# Altium PCB PCB1.PcbDoc
Units mm, origin at the board's own origin, x right, y up, seen from the top; angles counter-clockwise.
Board outline 60 x 60 mm, 2 copper layers (Top Layer, Bottom Layer); 35 components, 16 nets, 138 pads, 39 vias.
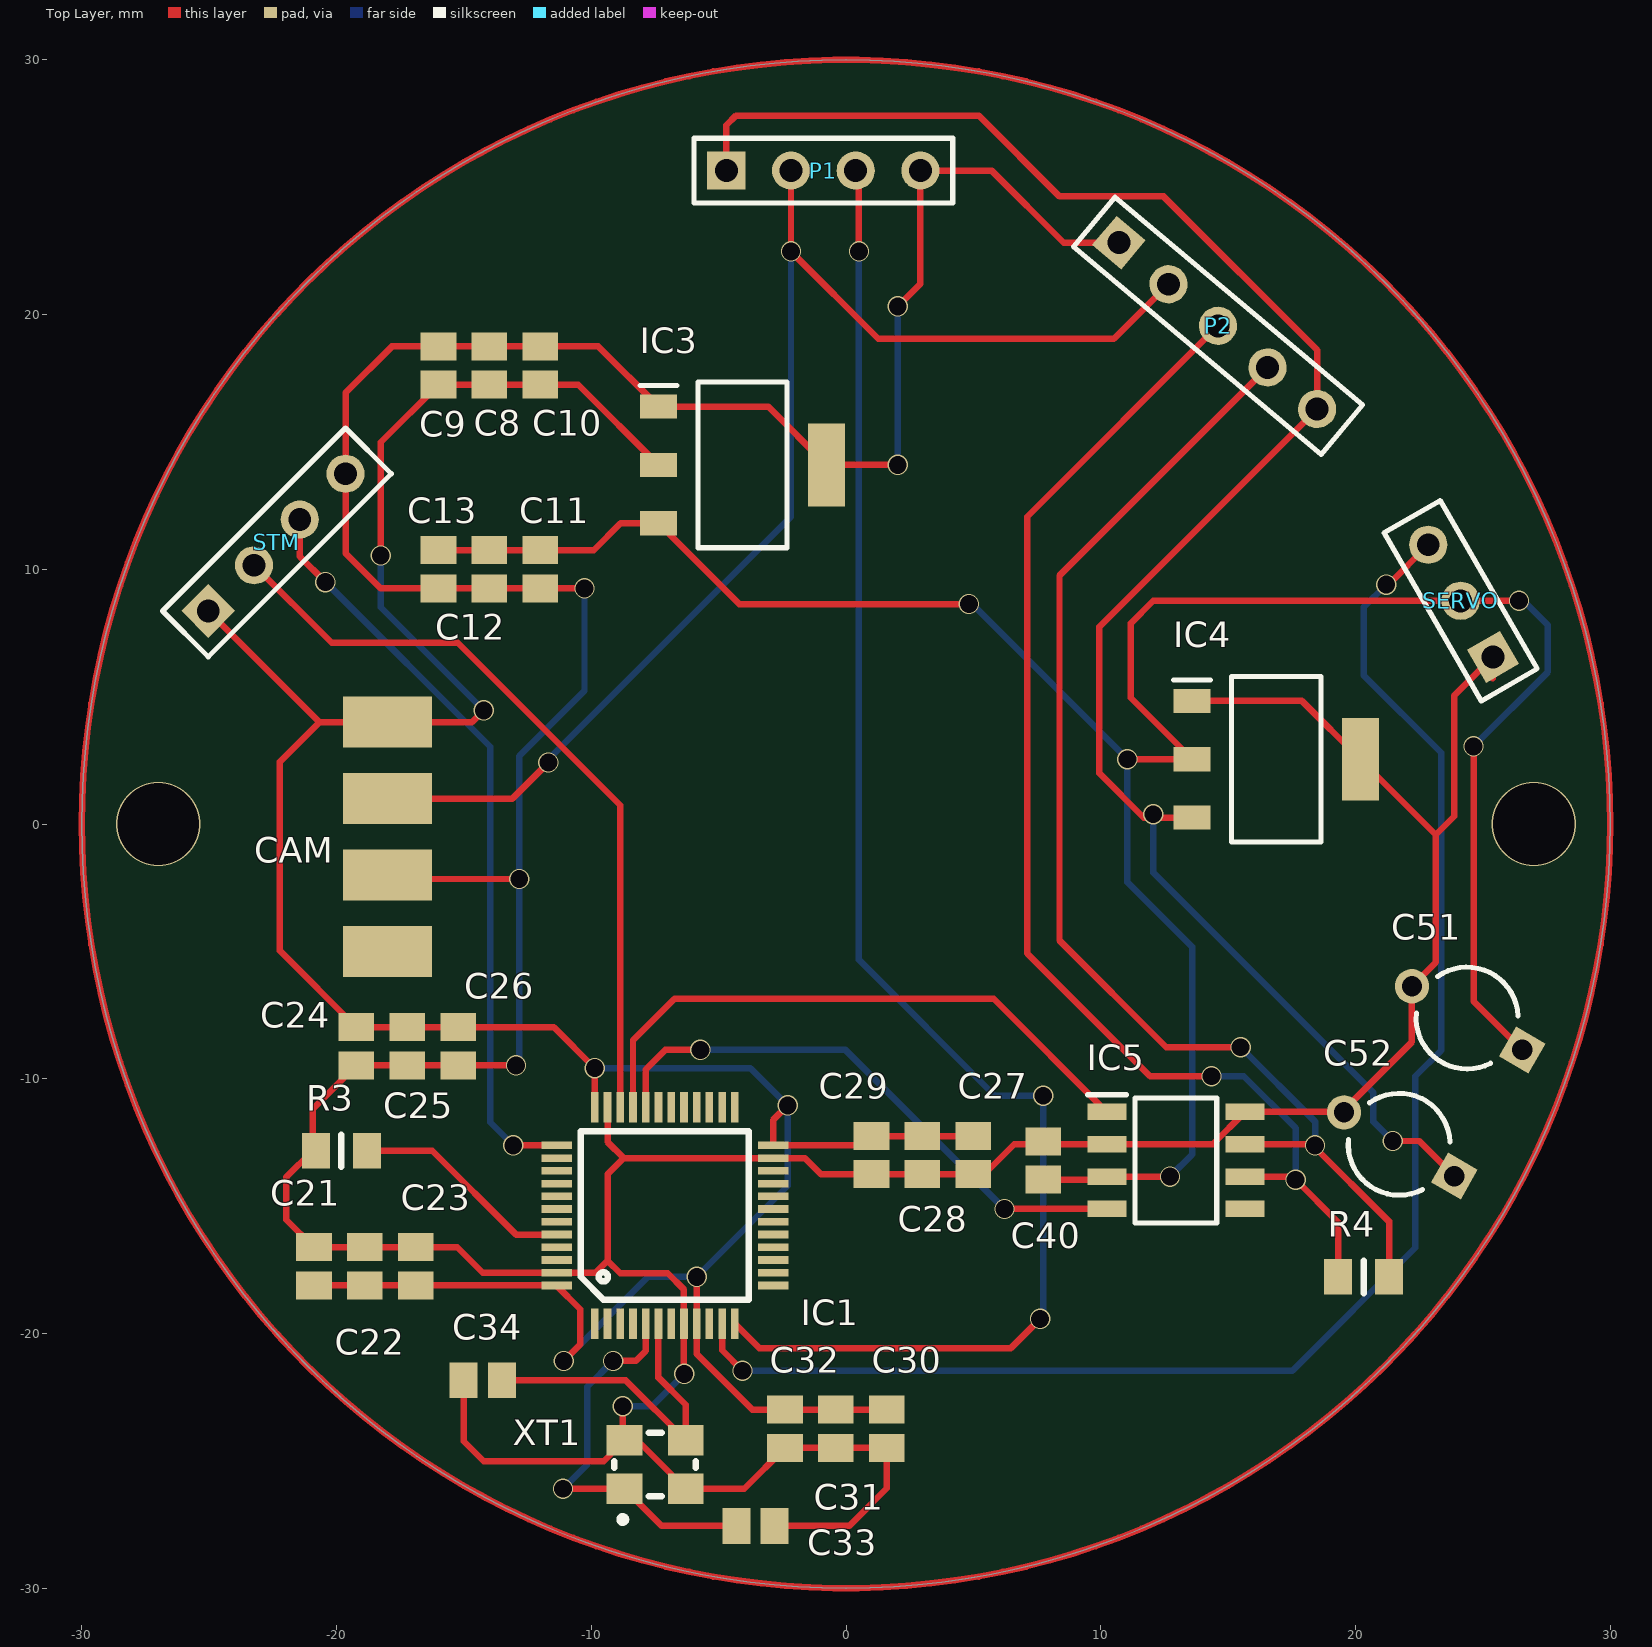
[diagram p0: Top Layer view]
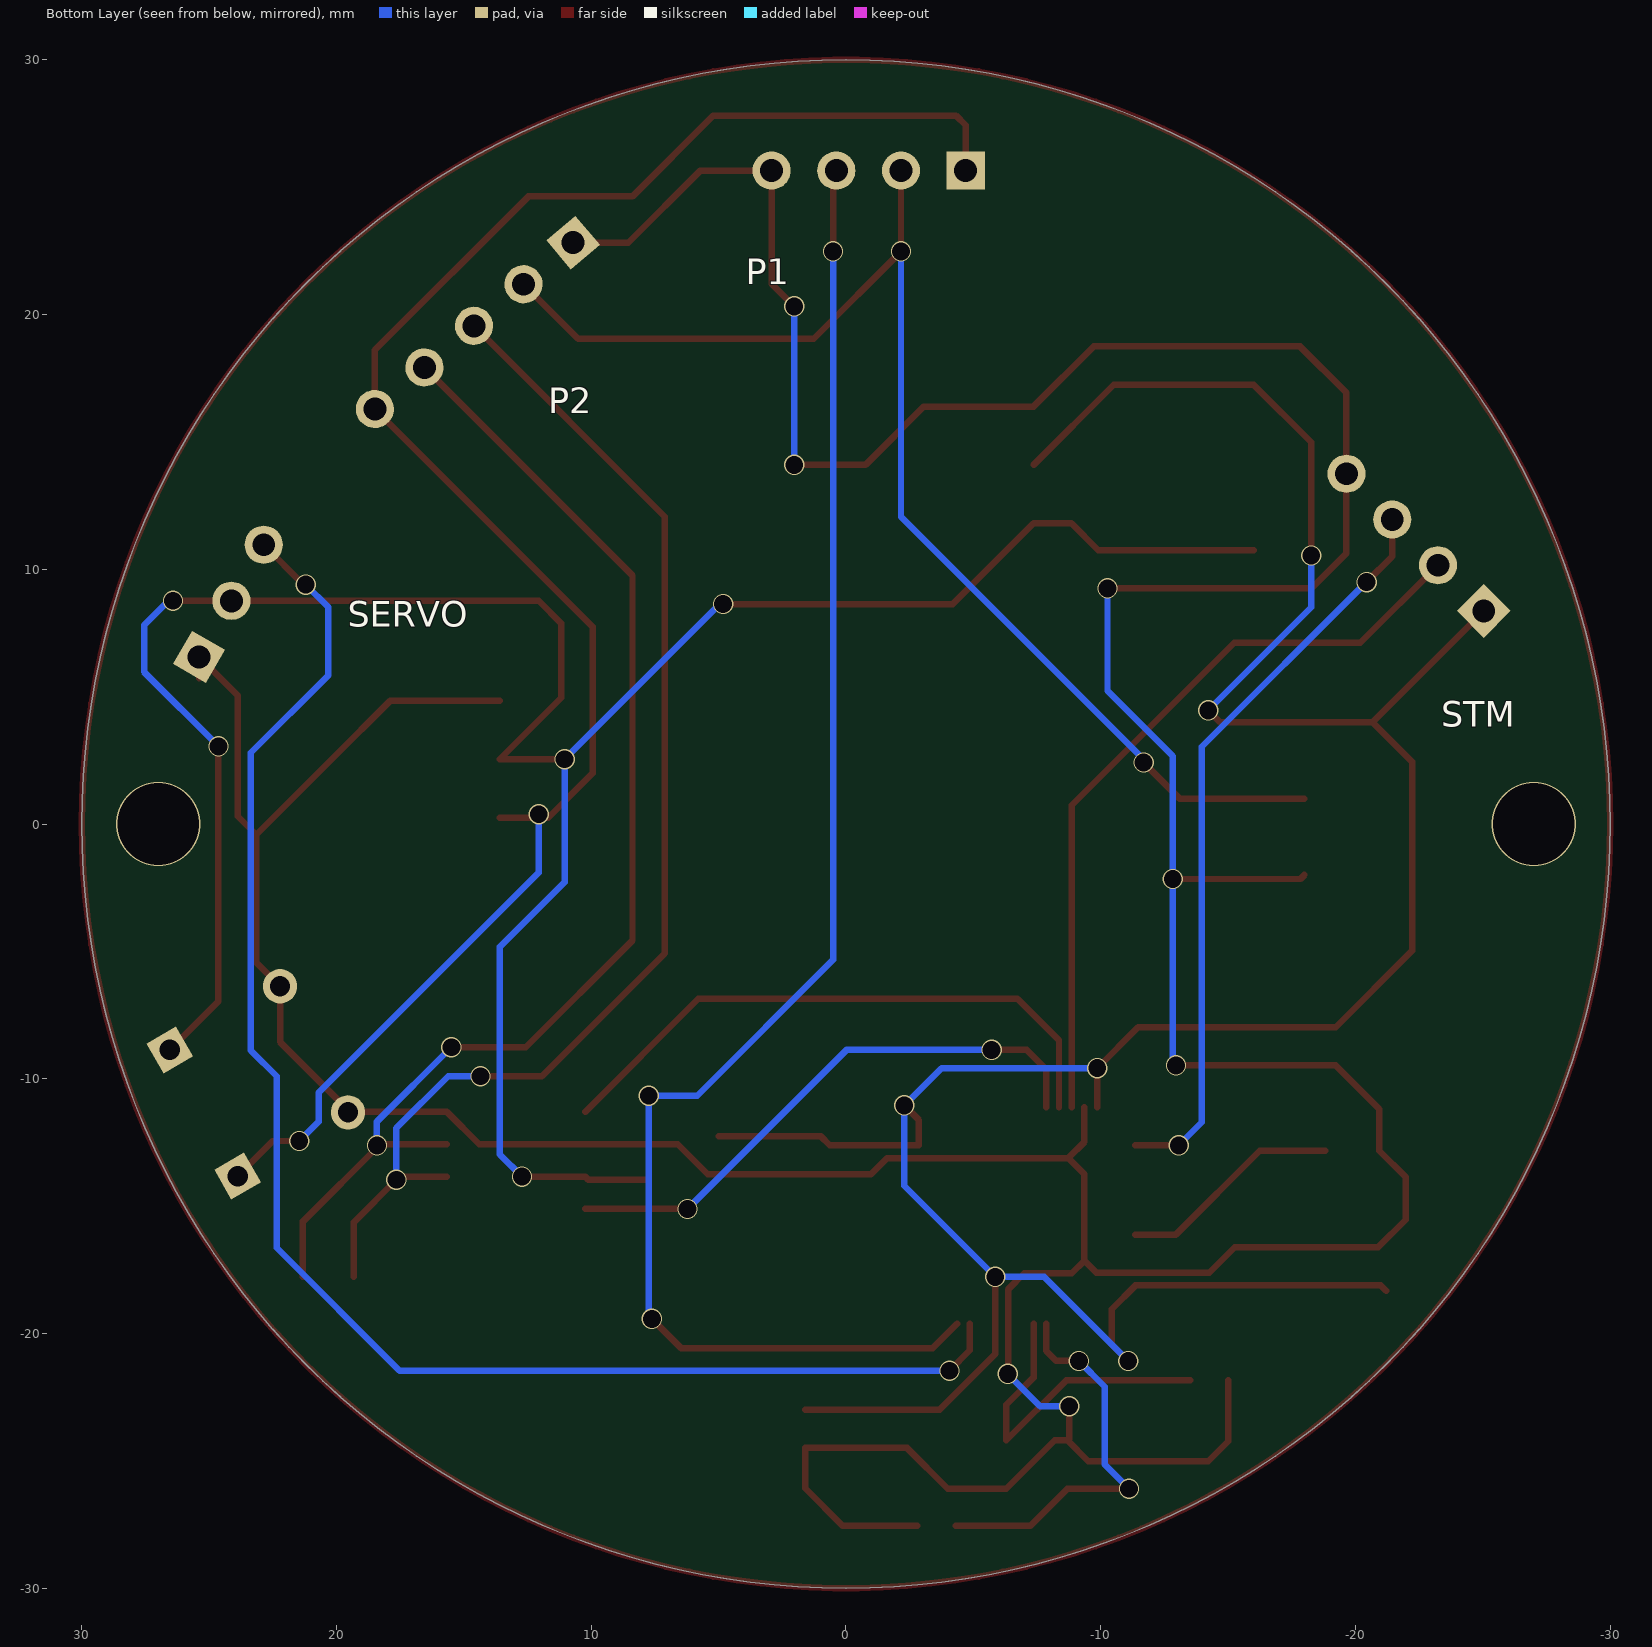
[diagram p1: Bottom Layer view, seen from below]

## Layer stack, top to bottom
Top Solder: solder mask 0.0102, Solder Resist, Dk 3.5
Top Layer: signal copper 0.0356
Dielectric 1: dielectric 0.32, FR-4, Dk 4.8
Bottom Layer: signal copper 0.0356
Bottom Solder: solder mask 0.0102, Solder Resist, Dk 3.5

## Board outline
-30,0 ccw(c0,0) 0,-30 ccw(c0,0) 30,0 ccw(c0,0) 0,30 ccw(c0,0)

## Design rules (kind name [scope] priority, off if disabled: settings)
Clearance [All] p1: gap=0.1 ignorepadtopadclearanceinfootprint=FALSE
PolygonConnect [All] p1: connectstyle=Relief reliefconductorwidth=0.254 reliefentries=4 polygonreliefangle="90 Angle" airgapwidth=0.254
RoutingVias [All] p1: holewidth=0.711 width=1.27 viastyle="Through Hole" minholewidth=0.711 minwidth=1.27 maxholewidth=0.711 maxwidth=1.27
SolderMaskExpansion [All] p1: expansion=0.102
Width [All] p1: maxlimit=0.254 minlimit=0.254 preferedwidth=0.254
30 further rules are at their usual default settings.

## Components (designator, comment, footprint, x,y, rotation, side; value= is the part's Value field where it differs from the comment)
C8 "Cap Semi" C0805 -14,18 r90 top value=100pF
C9 "Cap Semi" C0805 -16,18 r90 top value=100nF
C10 "Cap Semi" C0805 -12,18 r90 top value=100uF
C11 "Cap Semi" C0805 -12,10 r90 top value=100pF
C12 "Cap Semi" C0805 -14,10 r90 top value=100nF
C13 "Cap Semi" C0805 -16,10 r90 top value=100uF
C21 "Cap Semi" C0805 -20.889,-17.365 r90 top value=100uF
C22 "Cap Semi" C0805 -18.889,-17.365 r90 top value=100nF
C23 "Cap Semi" C0805 -16.889,-17.365 r90 top value=100pF
C24 "Cap Semi" C0805 -19.224,-8.728 r90 top value=100pF
C25 "Cap Semi" C0805 -17.224,-8.728 r90 top value=100nF
C26 "Cap Semi" C0805 -15.224,-8.728 r90 top value=100uF
C27 "Cap Semi" C0805 5,-13 r90 top value=100uF
C28 "Cap Semi" C0805 3,-13 r90 top value=100nF
C29 "Cap Semi" C0805 1,-13 r90 top value=100pF
C30 "Cap Semi" C0805 1.603,-23.746 r270 top value=100pF
C31 "Cap Semi" C0805 -0.397,-23.746 r270 top value=100nF
C32 "Cap Semi" C0805 -2.397,-23.746 r270 top value=100uF
C33 "22uF" C0805 -3.556,-27.559 r0 top
C34 "22uF" C0805 -14.26,-21.844 r180 top
C40 "Cap Semi" C0805 7.747,-13.208 r90 top value=47uF
C51 "Cap2" CAPR5-4X5 24.384,-7.62 r150 top value=10uF
C52 "Cap2" CAPR5-4X5 21.717,-12.573 r150 top value=10uF
CAM "CAM" PCBCOMPONENT_1 -18,4 r0 top
IC1 "STM32F103C8T6" LQFP48 -7.112,-15.367 r0 top
IC3 "AMS1117-3.3" SOT229P700X180-4N -4.064,14.097 r0 top
IC4 "AMS1117-5v" SOT229P700X180-4N 16.891,2.54 r0 top
IC5 "TJA1050T" SOIC127P600X175-8N 12.954,-13.208 r0 top
P1 "Header" HDR1X4 -4.699,25.654 r0 top
P2 "Header 5" HDR1X5 10.713,22.823 r320 top
R3 "10K" R0805 -19.812,-12.827 r180 top
R4 "120R" R0805 20.32,-17.78 r0 top value=120k
SERVO "Header 3" HDR1X3 25.4,6.563 r120 top (schematic designator P4)
STM "Header" HDR1X4 -25.037,8.364 r45 top (schematic designator P5)
XT1 "8Mhz" 3225-P -7.493,-25.146 r0 top

## Footprints (in the part's own frame and the unit in brackets; to place one, negate y for a bottom-side part, rotate by r counter-clockwise, add the part's x,y. Pads: shape width x height; smd on the part's side, far side on the other; paste and mask are expansions set on the pad)
3225-P [mm]
  rect 1.4x1.2 smd: 1(-1.2,-0.95) 2(-1.2,0.95) 2(1.2,-0.95) 3(1.2,0.95)
  silkscreen extent -1.6,-2.29 1.6,1.25, body extent -1.6,-1.25 1.6,1.25, height 0.61
C0805 [mm] "Chip Capacitor, Body 2.0x1.3mm, IPC High Density"
  rect 1.1x1.4 smd: 1(-0.75,0) 2(0.75,0)
  body extent -1.1,-0.72 1.1,0.72, height 1.4
CAPR5-4X5 [mm] "Capacitor; 2 Leads"
  rect 1.35x1.35 hole 0.8: 1(-2.5,0)
  round 1.35 hole 0.8: 2(2.5,0)
  silkscreen extent -1.69,-2 1.82,2
HDR1X3 [mm] "Connector; Header; 3 Position"
  rect 1.5x1.5 hole 0.9: 1(0,0)
  round 1.5 hole 0.9: 2(2.54,0) 3(5.08,0)
  silkscreen extent -1.27,-1.27 6.35,1.27
HDR1X4 [mm] "Connector; Header; 4 Position"
  rect 1.5x1.5 hole 0.9: 1(0,0)
  round 1.5 hole 0.9: 2(2.54,0) 3(5.08,0) 4(7.62,0)
  silkscreen extent -1.27,-1.27 8.89,1.27
HDR1X5 [mm] "Connector; Header; 5 Position"
  rect 1.5x1.5 hole 0.9: 1(0,0)
  round 1.5 hole 0.9: 2(2.54,0) 3(5.08,0) 4(7.62,0) 5(10.16,0)
  silkscreen extent -1.27,-1.27 11.43,1.27
LQFP48 [mm]
  rect 0.3x1.2 smd: 1(-2.75,-4.25) 2(-2.25,-4.25) 3(-1.75,-4.25) 4(-1.25,-4.25) 5(-0.75,-4.25) 6(-0.25,-4.25) 7(0.25,-4.25) 8(0.75,-4.25) 9(1.25,-4.25) 10(1.75,-4.25) 11(2.25,-4.25) 12(2.75,-4.25) 25(2.75,4.25) 26(2.25,4.25) 27(1.75,4.25) 28(1.25,4.25) 29(0.75,4.25) 30(0.25,4.25) 31(-0.25,4.25) 32(-0.75,4.25) 33(-1.25,4.25) 34(-1.75,4.25) 35(-2.25,4.25) 36(-2.75,4.25)
  rect 1.2x0.3 smd: 13(4.25,-2.75) 14(4.25,-2.25) 15(4.25,-1.75) 16(4.25,-1.25) 17(4.25,-0.75) 18(4.25,-0.25) 19(4.25,0.25) 20(4.25,0.75) 21(4.25,1.25) 22(4.25,1.75) 23(4.25,2.25) 24(4.25,2.75) 37(-4.25,2.75) 38(-4.25,2.25) 39(-4.25,1.75) 40(-4.25,1.25) 41(-4.25,0.75) 42(-4.25,0.25) 43(-4.25,-0.25) 44(-4.25,-0.75) 45(-4.25,-1.25) 46(-4.25,-1.75) 47(-4.25,-2.25) 48(-4.25,-2.75)
  silkscreen extent -3.3,-3.3 3.3,3.3, body extent -4.5,-4.5 4.5,4.5, height 1.47
PCBCOMPONENT_1 [mm]
  rect 3.5x2 smd: 1(0,0) 2(0,-3) 3(0,-6) 4(0,-9)
R0805 [mm]
  rect 1.1x1.4 smd: 1(-1,0) 2(1,0)
  silkscreen extent 0,-0.64 0,0.64, body extent -1.15,-0.67 1.15,0.68, height 0.76
SOIC127P600X175-8N [mm]
  rect 1.525x0.65 smd: 1(-2.712,1.905) 2(-2.712,0.635) 3(-2.712,-0.635) 4(-2.712,-1.905) 5(2.712,-1.905) 6(2.712,-0.635) 7(2.712,0.635) 8(2.712,1.905)
  silkscreen extent -3.47,-2.45 1.6,2.58, body extent -3,-2.45 3,2.45, height 1.75
SOT229P700X180-4N [mm]
  rect 1.45x0.95 smd: 1(-3.3,2.29) 2(-3.3,0) 3(-3.3,-2.29)
  rect 1.45x3.25 smd: 4(3.3,0)
  silkscreen extent -4.03,-3.25 1.75,3.25, body extent -3.35,-3.15 3.35,3.15, height 1.8

## Part data
C8 C9 C10 C11 C12 C13 C21 C22 C23 C24 C25 C26 C27 C28 C29 C30 C31 C32 C40: "Capacitor (Semiconductor SIM Model)", LatestRevisionDate=29-May-2009, LatestRevisionNote="IPC-7351 Footprint Added.", PackageDescription="Chip Capacitor", PackageReference=C1206, Published=8-Jun-2000, Publisher="Altium Limited"
C33 C34: library part Cap
C51 C52: "Capacitor", PackageDescription="Capacitor; 2 Leads", PackageReference=CAPR5-4X5, Published=23-Sep-2002, Publisher="Altium Limited"
CAM: library part COMPONENT_1
IC3: "Integrated Circuit", Manufacturer_Name=Advanced, Datasheet Link=https://datasheet.datasheetarchive.com/originals/distributors/Datasheets-28/DSA-550594.pdf, Height=1.8mm, Manufacturer_Part_Number=AMS1117-3.3
IC4: library part AMS1117-3.3, "Integrated Circuit", Manufacturer_Name=Advanced, Datasheet Link=https://datasheet.datasheetarchive.com/originals/distributors/Datasheets-28/DSA-550594.pdf, Height=1.8mm, Manufacturer_Part_Number=AMS1117-3.3
IC5: "Integrated Circuit", Manufacturer_Name=NXP, Mouser Part Number=N/A, Datasheet Link=https://datasheet.datasheetarchive.com/originals/distributors/Datasheets-NXP/DSANXP010005907.pdf, Height=1.75mm, Manufacturer_Part_Number=TJA1050T, Mouser Price/Stock=https://www.mouser.co.uk/ProductDetail/NXP-Semiconductors/TJA1050T?qs=WhRErS6oET%252B5mtiFrt9ZMQ%3D%3D
P1 STM: library part "Header 4", LatestRevisionDate=17-Jul-2002, LatestRevisionNote="Re-released for DXP Platform.", Publisher="Altium Limited"
P2: "Header, 5-Pin", LatestRevisionDate=17-Jul-2002, LatestRevisionNote="Re-released for DXP Platform.", Publisher="Altium Limited"
R3: library part Resistor_1
R4: library part Res3, "Resistor", LatestRevisionDate=29-May-2009, LatestRevisionNote="IPC-7351 Footprint Added.", PackageDescription="Chip Resistor", PackageReference=J1-0603, Published=8-Jun-2000, Publisher="Altium Limited"
SERVO: "Header, 3-Pin", LatestRevisionDate=17-Jul-2002, LatestRevisionNote="Re-released for DXP Platform.", Publisher="Altium Limited"
XT1: library part "Passive Crystal"

## Via types
v1: diameter 0.8, hole 0.7, Top Layer to Bottom Layer, 37 vias
v2: diameter 3.3, hole 3.2, Top Layer to Bottom Layer, 2 vias

## Nets (pads, with @x,y where several pads share a name; then routed paths per layer and width w, separated by ;. In a path a pad name is that pad's centre, name@x,y a point inside that pad or via, vN(x,y) a via of type N, cw(c..) or ccw(c..) an arc to the next point about the centre after c; other vN are vias at no path point)
3.3v: C8.1 C9.1 C10.1 C21.1 C22.1 C23.1 C24.2 C25.2 C26.2 C27.2 C28.2 C29.2 C30.1 C31.1 C32.1 CAM.1 IC1.9 IC1.24 IC1.36 IC1.48 IC3.2 STM.1 | length 121.5
  Top Layer w0.254: STM.1 -20.673,4 ; C21.1@-21.204,-18.323 -20.996,-18.115 C21.1 C22.1 C23.1 -11.364,-18.115 IC1.48 -10.429,-19.05 -10.429,-20.432 v1(-11.079,-21.082) ; v1(-18.267,10.541) -18.267,14.983 C9.1 C8.1 C10.1 -10.517,17.25 IC3.2 ; v1@-14.078,4.608 v1(-14.224,4.462) -14.686,4 CAM.1 -20.673,4 ; IC1.36 v1(-9.862,-9.584) -11.468,-7.978 C26.2 C25.2 C24.2 -22.225,-4.977 -22.225,2.448 -20.673,4 ; v1(-5.862,-17.78) IC1.9 -5.862,-20.808 -3.674,-22.996 C32.1 C31.1 C30.1 ; v1(-2.286,-11.049) -2.862,-11.625 IC1.24 0.633,-12.617 C29.2 C28.2 C27.2
  Bottom Layer w0.254: v1(-18.267,10.541) -18.267,8.505 v1(-14.224,4.462) ; v1(-11.079,-21.082) -7.777,-17.78 v1(-5.862,-17.78) -2.286,-14.204 v1(-2.286,-11.049) -3.751,-9.584 v1(-9.862,-9.584)
5V: C11.2 C12.2 C13.2 C40.1 C51.1 IC3.3 IC4.2 IC5.3 SERVO.2 | length 98.8
  Top Layer w0.254: C13.2 C12.2 C11.2 -9.906,10.75 -8.849,11.807 IC3.3 -4.193,8.636 v1(4.826,8.636) ; C40.1 10.127,-13.958 IC5.3 v1(12.72,-13.843) ; v1(11.049,2.54) IC4.2 11.176,4.955 11.176,7.874 12.065,8.763 SERVO.2 v1(26.422,8.763) ; v1(24.638,3.048) 24.638,-6.959 C51.1
  Bottom Layer w0.254: v1(4.826,8.636) 4.953,8.636 v1(11.049,2.54) 11.049,-2.286 13.589,-4.826 13.589,-12.974 v1(12.72,-13.843) ; v1(24.638,3.048) 27.559,5.969 27.559,7.798 26.594,8.763 v1(26.422,8.763)
12V: C52.1 IC4.3 P1.1 P2.5 | length 73.7
  Top Layer w0.254: P1.1 -4.699,27.432 -4.318,27.813 5.207,27.813 8.382,24.638 12.466,24.638 18.497,18.607 P2.5 9.951,7.747 9.951,1.987 11.688,0.25 IC4.3 ; v1(21.463,-12.446) 22.505,-12.446 C52.1 C52.1@23.882,-13.329
  Bottom Layer w0.254: v1(12.065,0.381) 12.065,-1.905 20.701,-10.541 20.701,-11.684 v1(21.463,-12.446)
CAN_RX: IC1.32 IC5.4 | length 22.5
  Top Layer w0.254: IC1.32 -7.862,-9.64 -7.092,-8.87 v1(-5.715,-8.87) ; v1(6.223,-15.113) IC5.4
  Bottom Layer w0.254: v1(-5.715,-8.87) -0.02,-8.87 v1(6.223,-15.113)
CAN_TX: IC1.33 IC5.1 | length 23.7
  Top Layer w0.254: IC1.33 -8.362,-8.489 -6.731,-6.858 5.797,-6.858 IC5.1
GND: C8.2 C9.2 C10.2 C11.1 C12.1 C13.1 C21.2 C22.2 C23.2 C24.1 C25.1 C26.1 C27.1 C28.1 C29.1 C30.2 C31.2 C32.2 C33.2 C34.2 C40.2 C51.2 C52.2 CAM.3 IC1.8 IC1.23 IC1.35 IC1.47 IC3.1 IC3.4 IC4.1 IC4.4 IC5.2 IC5.8 P1.4 P2.1 R3.2 SERVO.1 STM.4 XT1.2 | length 220.8
  Top Layer w0.254: CAM.3 -17.841,-2.159 v1(-12.827,-2.159) ; C34.2 -15.01,-24.233 -14.224,-25.019 -9.516,-25.019 XT1.2@-8.693,-24.196 ; v1(-12.954,-9.478) C26.1 C25.1 C24.1 -20.939,-11.193 -20.939,-12.827 -21.971,-13.859 -21.971,-15.533 C21.2 C22.2 C23.2 -15.262,-16.615 -14.26,-17.617 IC1.47 -9.834,-17.617 -9.36,-17.143 ; v1(-10.266,9.25) C11.1 C12.1 C13.1 -18.267,9.25 -19.649,10.632 STM.4 -19.649,16.927 -17.826,18.75 C9.2 C8.2 C10.2 -9.727,18.75 IC3.1 -3.054,16.387 IC3.4 v1(2.032,14.097) ; IC1.35 -9.362,-12.482 -8.727,-13.117 ; v1(-8.763,-22.86) -8.763,-24.126 XT1.2@-8.693,-24.196 ; v1(-6.35,-21.59) -6.362,-21.578 IC1.8 -6.362,-18.276 -6.997,-17.641 -8.862,-17.641 -9.36,-17.143 ; C33.2 0.127,-27.559 1.603,-26.083 C30.2 C31.2 C32.2 -3.997,-26.096 -6.293,-26.096 -8.193,-24.196 XT1.2@-8.693,-24.196 ; v1(2.032,20.32) 2.921,21.209 P1.4 5.715,25.654 8.546,22.823 P2.1 ; IC4.1 17.901,4.83 IC4.4 23.154,-0.423 ; SERVO.1@25.4,5.719 SERVO.1@25.4,5.927 ; SERVO.1 23.882,5.045 23.882,0.305 23.154,-0.423 ; -9.36,-17.143 -9.36,-13.75 -8.727,-13.117 ; -8.727,-13.117 IC1.23 -1.615,-13.117 -0.982,-13.75 C29.1 C28.1 C27.1 5.427,-13.75 6.604,-12.573 IC5.2 14.396,-12.573 IC5.8 19.471,-11.303 22.219,-8.555 C51.2 23.154,-5.435 23.154,-0.423
  Bottom Layer w0.254: v1(-12.954,-9.478) -12.827,-9.351 v1(-12.827,-2.159) -12.827,2.667 -10.266,5.228 v1(-10.266,9.25) ; v1(-8.763,-22.86) -7.62,-22.86 v1(-6.35,-21.59) ; v1(2.032,14.097) v1(2.032,20.32)
NetC33_1: C33.1 IC1.5 XT1.1 | length 15.8
  Top Layer w0.254: v1(-11.11,-26.096) XT1.1 -7.23,-27.559 C33.1 ; v1(-9.144,-21.082) -8.255,-21.082 -7.862,-20.689 IC1.5
  Bottom Layer w0.254: v1(-11.11,-26.096) -10.16,-25.146 -10.16,-22.098 v1(-9.144,-21.082)
NetC34_1: C34.1 IC1.6 XT1.3 | length 13.2
  Top Layer w0.254: C34.1 -8.645,-21.844 XT1.3 -6.293,-22.802 -7.362,-21.733 IC1.6
NetCAM_2: CAM.2 P1.2 P2.2 | length 51.2
  Top Layer w0.254: CAM.2 -13.097,1 v1(-11.684,2.413) ; P1.2 v1(-2.159,22.479) 1.27,19.05 10.519,19.05 P2.2
  Bottom Layer w0.254: v1(-11.684,2.413) -11.684,2.54 -2.159,12.065 v1(-2.159,22.479)
NetIC1_11: IC1.11 SERVO.3 | length 60.9
  Top Layer w0.254: IC1.11 -4.862,-20.665 v1(-4.064,-21.463) ; v1@21.295,9.398 SERVO.3
  Bottom Layer w0.254: v1(-4.064,-21.463) 17.526,-21.463 22.352,-16.637 22.352,-9.906 23.368,-8.89 23.368,2.794 20.32,5.842 20.32,8.509 v1(21.209,9.398)
NetIC1_12: IC1.12 P1.3 | length 62.2
  Top Layer w0.254: IC1.12 -3.405,-20.574 6.477,-20.574 v1(7.62,-19.431) ; P1.3 0.508,25.527 v1(0.508,22.479)
  Bottom Layer w0.254: v1(0.508,22.479) 0.508,-5.334 5.842,-10.668 v1(7.747,-10.668) 7.747,-19.304 v1(7.62,-19.431)
NetIC1_44: IC1.44 R3.1 | length 8.8
  Top Layer w0.254: R3.1 -16.244,-12.827 -12.954,-16.117 IC1.44
NetIC5_6: IC5.6 P2.3 R4.1 | length 49.7
  Top Layer w0.254: v1(14.351,-9.906) 11.938,-9.906 7.112,-5.08 7.112,12.065 P2.3 ; IC5.6 17.526,-13.843 v1(17.653,-13.97) 19.32,-15.637 R4.1
  Bottom Layer w0.254: v1(14.351,-9.906) 15.621,-9.906 17.653,-11.938 v1(17.653,-13.97)
NetIC5_7: IC5.7 P2.4 R4.2 | length 48.9
  Top Layer w0.254: v1(15.494,-8.763) 12.573,-8.763 8.382,-4.572 8.382,9.757 P2.4 ; IC5.7 18.288,-12.573 21.32,-15.605 R4.2
  Bottom Layer w0.254: v1(15.494,-8.763) 18.415,-11.684 v1(18.415,-12.617)
SWCLK: IC1.37 STM.3 | length 29.7
  Top Layer w0.254: STM.3 -21.445,10.504 v1(-20.439,9.498) ; v1(-13.062,-12.617) IC1.37
  Bottom Layer w0.254: v1(-20.439,9.498) -13.97,3.029 -13.97,-11.709 v1(-13.062,-12.617)
SWDIO: IC1.34 STM.2 | length 30.1
  Top Layer w0.254: STM.2 -20.193,7.112 -15.24,7.112 -8.862,0.734 IC1.34
pads on no net: CAM.4 IC1.1 IC1.2 IC1.3 IC1.4 IC1.7 IC1.10 IC1.13 IC1.14 IC1.15 IC1.16 IC1.17 IC1.18 IC1.19 IC1.20 IC1.21 IC1.22 IC1.25 IC1.26 IC1.27 IC1.28 IC1.29 IC1.30 IC1.31 IC1.38 IC1.39 IC1.40 IC1.41 IC1.42 IC1.43 IC1.45 IC1.46 IC5.5
copper on no net: | length 188.5
  Top Layer w0.254: 30,0 ccw(c0,0) 30,0
  other v2: -27,0 27,0

## Silkscreen, mask and mechanical layers (free items; w line width, h text height)
Mechanical 13:
  the board outline again, w0.4